# Altium PCB PCB_2020-07-24_15-45-59_2020-09-12_09-14-54.pcbdoc
Units mil, origin at the board's own origin, x right, y up, seen from the top; angles counter-clockwise.
Board outline 3558 x 2858.59 mil, 2 copper layers (Top Layer, Bottom Layer); 27 components, 24 nets, 132 pads, 36 vias.
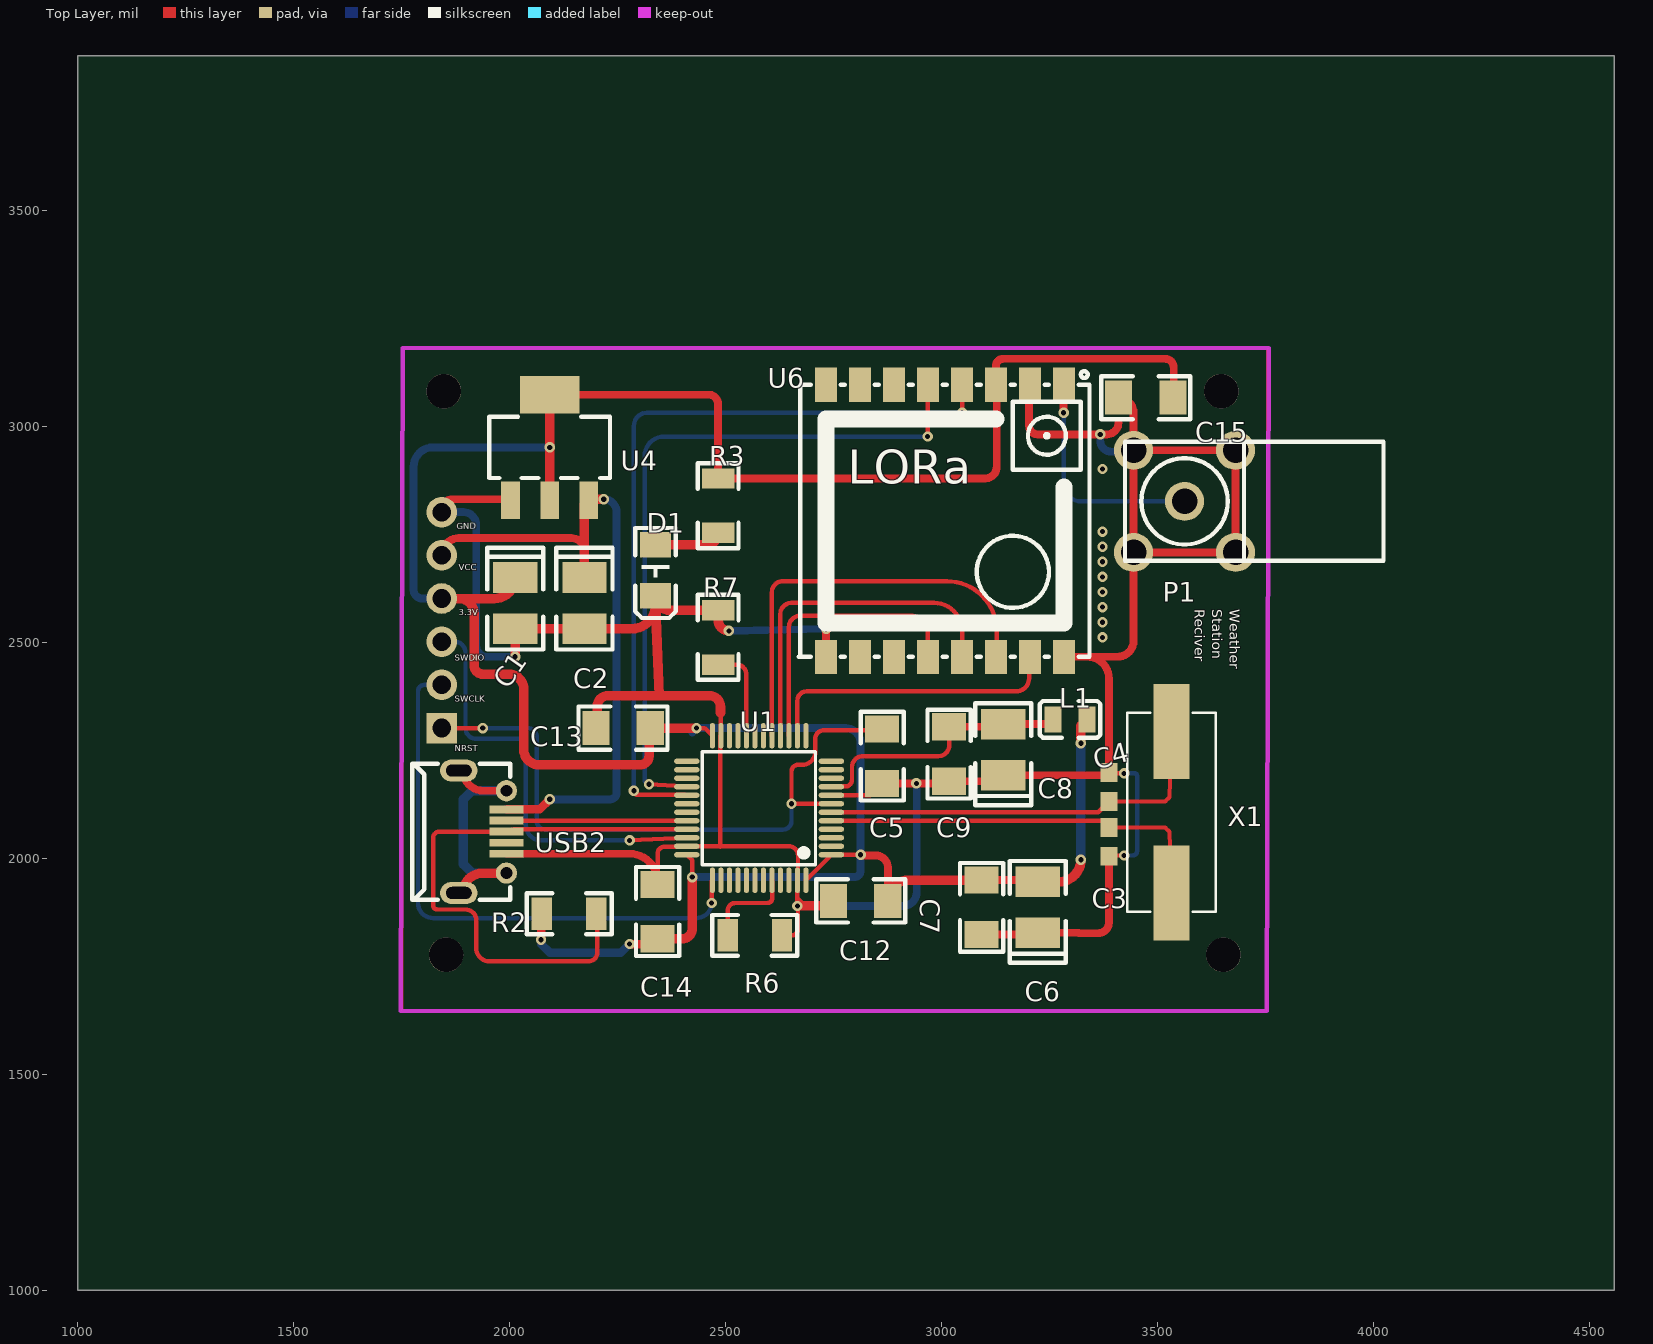
[diagram p0: Top Layer view]
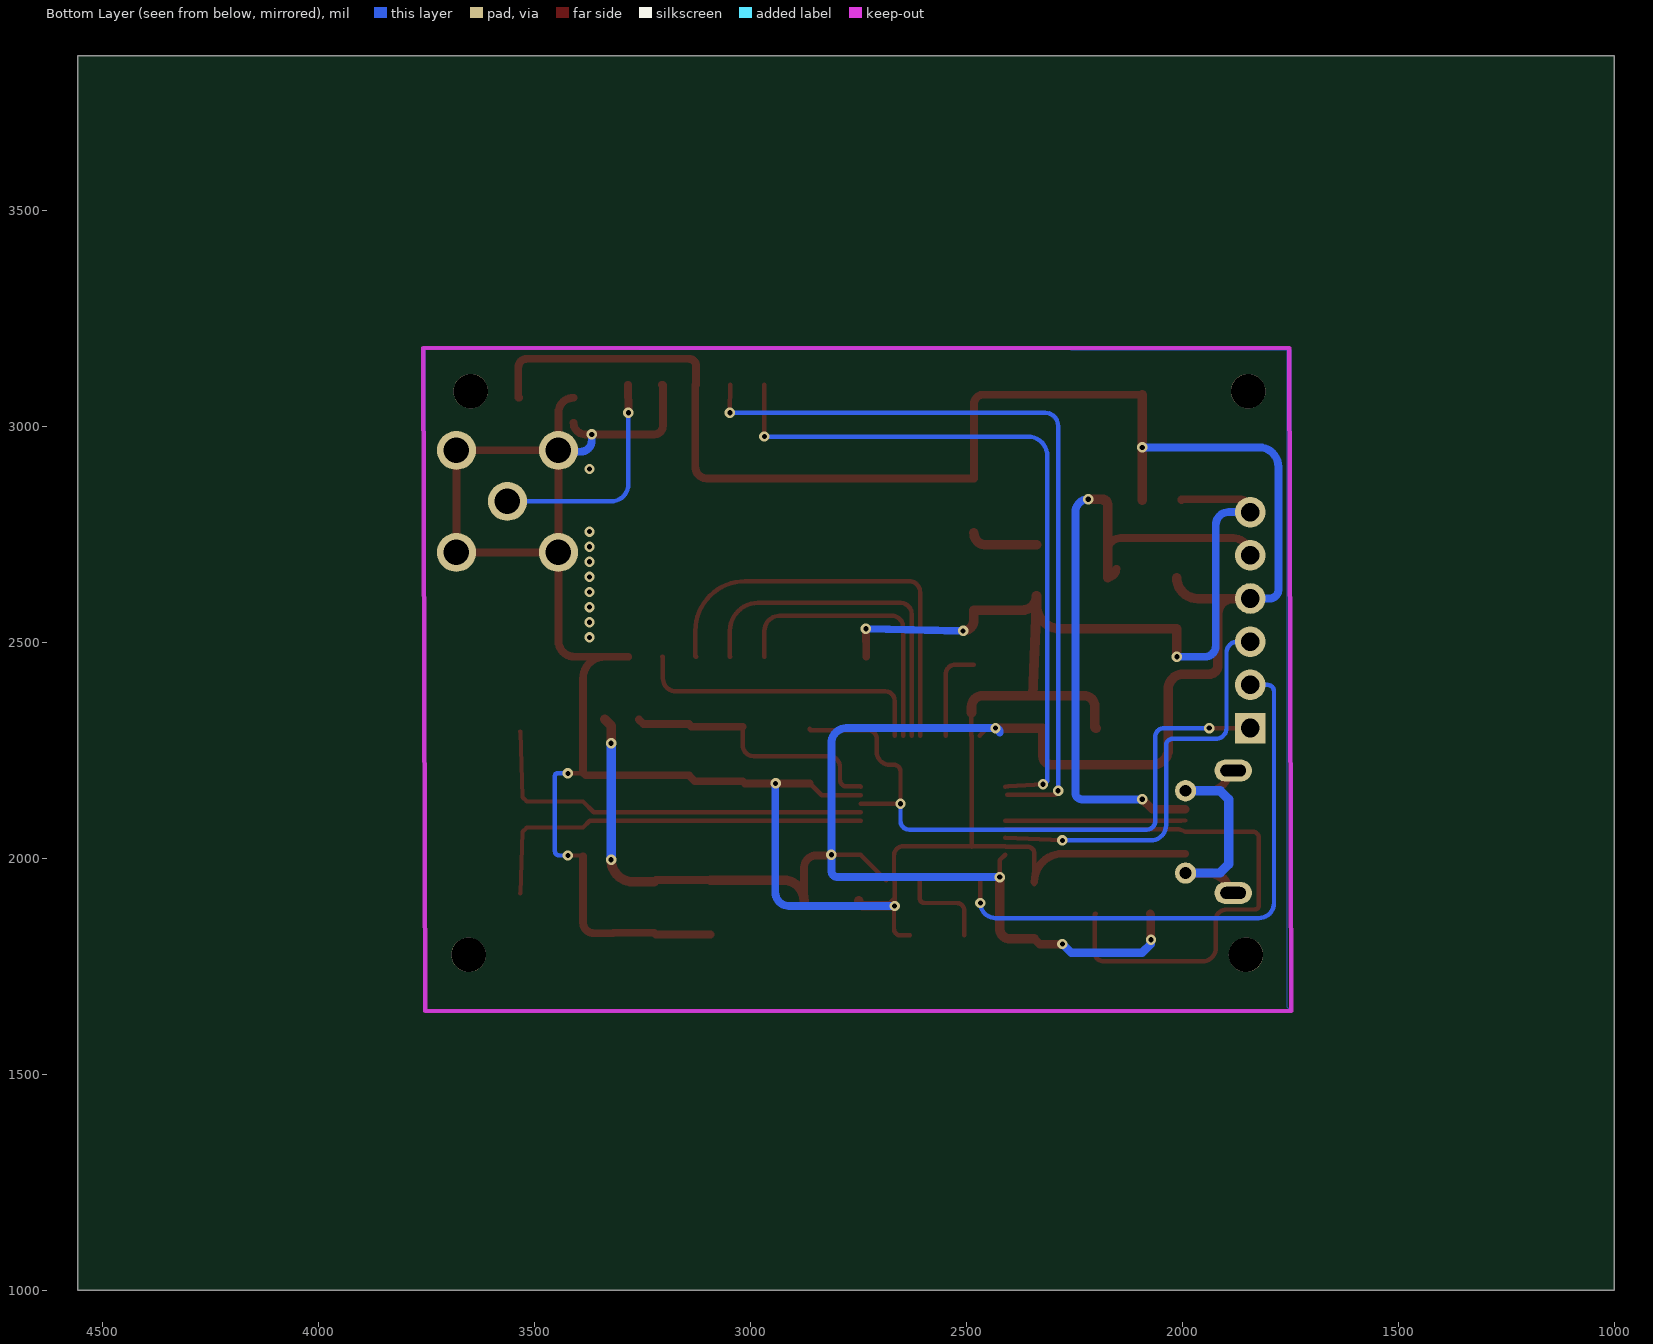
[diagram p1: Bottom Layer view, seen from below]

## Layer stack, top to bottom
Top Layer: signal copper (thickness not stored)
Dielectric: dielectric 12.6, FR-4, Dk 4.8
Bottom Layer: signal copper (thickness not stored)

## Board outline
4558,1000 1000,1000 1000,3858.59 4558,3858.59

## Components (designator, comment, footprint, x,y, rotation, side; value= is the part's Value field where it differs from the comment)
C1 "10uF" CAP-SMD_L3.5-W2.8-R-RD 2013.39,2591.2 r90 top
C2 "10uF" CAP-SMD_L3.5-W2.8-R-RD 2173.39,2591.2 r90 top
C3 "10PF" 0603 3387.89,2071.7 r270 top
C4 "10PF" 0603 3387.89,2131.7 r90 top
C5 "100nF" 1206 2862.89,2236.7 r90 top
C6 "10uF" CAP-SMD_L3.5-W2.8-R-RD 3222.89,1886.69 r270 top
C7 "100nF" 1206 3092.89,1886.69 r270 top
C8 "1uF" CAP-SMD_L3.5-W2.8-R-RD 3142.89,2251.7 r270 top
C9 "100nF" 1206 3017.89,2241.7 r270 top
C12 "100nF" 1206 2812.89,1901.69 r0 top
C13 "100nF" 1206 2262.89,2301.7 r180 top
C14 "100nF" 1206 2342.89,1876.69 r90 top
C15 "100nF" 1206 3472.89,3066.7 r0 top
D1 "LED" LED1206-R-RD 2337.89,2666.7 r90 top
L1 "4.7uH" L0805 3297.89,2321.7 r0 top
P1 "ANT-CON" SMA-KWE 3562.89,2826.7 r0 top
R2 "1.5k" R1206 2137.89,1871.69 r0 top
R3 "100" R1206 2482.89,2816.7 r270 top
R6 "10k" R1206 2567.89,1821.69 r180 top
R7 "10k" R1206 2482.89,2511.7 r90 top
U1 "STM32F103CBT6" LQFP-48_L7.0-W7.0-P0.50-LS9.0-BL 2577.89,2116.7 r90 top
U4 "AMS1117-3.3V" SOT-223-3_L6.5-W3.4-P2.30-LS7.0-BR 2092.89,2951.7 r270 top
U6 "RA-02" WIRELM-SMD_RA-02 3007.89,2781.7 r270 top
USB2 "Micro Usb" MICRO-USB-SMD_MICRO-USB-18 1937.89,2061.7 r270 top
X1 "8MHz" HC-49US-SMD 3532.89,2096.7 r90 top
? "" ? 2752.89,3269.14 r0 top
? "" ? 1627.49,2414.2 r0 top

## Footprints (in the part's own frame and the unit in brackets; to place one, negate y for a bottom-side part, rotate by r counter-clockwise, add the part's x,y. Pads: shape width x height; smd on the part's side, far side on the other; paste and mask are expansions set on the pad)
0603 [mm]
  rect 1.1x1 smd: 1(0,0) 2(1.7,0)
1206 [mil]
  rect 63x78.74 smd: 1(-62.99,0) 2(62.99,0)
  silkscreen extent -103,-50 103,50
CAP-SMD_L3.5-W2.8-R-RD [mil]
  rect 70.86x102.36 smd: 1(59.1,0) 2(-59.1,0)
  silkscreen extent -107,-65 128,65
HC-49US-SMD [mm]
  rect 5.6x2.1 smd: 1(-4.5,0) 2(5,0)
  silkscreen extent -5.6,-2.6 6.1,2.6
L0805 [mm]
  rect 1x1.55 smd: 1(-1,0) 2(1,0)
  silkscreen extent -1.78,-1.08 1.78,1.08
LED1206-R-RD [mm]
  rect 1.5x1.8 smd: 1(1.5,0) 2(-1.5,0)
  silkscreen extent -2.8,-1.2 2.5,1.2
LQFP-48_L7.0-W7.0-P0.50-LS9.0-BL [mm]
  oval 0.3x1.5 smd: 1(-2.75,-4.25) 2(-2.25,-4.25) 3(-1.75,-4.25) 4(-1.25,-4.25) 5(-0.75,-4.25) 6(-0.25,-4.25) 7(0.25,-4.25) 8(0.75,-4.25) 9(1.25,-4.25) 10(1.75,-4.25) 11(2.25,-4.25) 12(2.75,-4.25) 25(2.75,4.25) 26(2.25,4.25) 27(1.75,4.25) 28(1.25,4.25) 29(0.75,4.25) 30(0.25,4.25) 31(-0.25,4.25) 32(-0.75,4.25) 33(-1.25,4.25) 34(-1.75,4.25) 35(-2.25,4.25) 36(-2.75,4.25)
  oval 1.5x0.3 smd: 13(4.25,-2.75) 14(4.25,-2.25) 15(4.25,-1.75) 16(4.25,-1.25) 17(4.25,-0.75) 18(4.25,-0.25) 19(4.25,0.25) 20(4.25,0.75) 21(4.25,1.25) 22(4.25,1.75) 23(4.25,2.25) 24(4.25,2.75) 37(-4.25,2.75) 38(-4.25,2.25) 39(-4.25,1.75) 40(-4.25,1.25) 41(-4.25,0.75) 42(-4.25,0.25) 43(-4.25,-0.25) 44(-4.25,-0.75) 45(-4.25,-1.25) 46(-4.25,-1.75) 47(-4.25,-2.25) 48(-4.25,-2.75)
  silkscreen extent -3.33,-3.31 3.3,3.34
MICRO-USB-SMD_MICRO-USB-18 [mm]
  oval 1.3x2.199 hole 0.7 slot 1.5 at 90 deg: 0(-3.6,-1.407) 0(3.6,-1.407)
  round 1.25 hole 0.7: 0(-2.41,1.393) 0(2.431,1.393)
  rect 0.45x2 smd: 1(-1.31,1.407) 2(-0.66,1.407) 3(-0.01,1.407) 4(0.64,1.407) 5(1.29,1.407)
  silkscreen extent -4,-4.15 4,1.61
R1206 [mm]
  rect 1.2x1.9 smd: 1(-1.6,0) 2(1.6,0)
  silkscreen extent -2.5,-1.2 2.5,1.2
SMA-KWE [mm]
  round 2.3 hole 1.5: 1(0,0) 2(-3,3) 3(-3,-3) 4(3,-3) 5(3,3)
  silkscreen extent -3.5,-3.5 11.7,3.5
SOT-223-3_L6.5-W3.4-P2.30-LS7.0-BR [mm]
  rect 2.2x1.1 smd: 1(3.099,-2.3) 2(3.099,0) 3(3.099,2.3)
  rect 2.2x3.5 smd: 4(-3.099,0)
  silkscreen extent -1.8,-3.55 1.8,3.55
WIRELM-SMD_RA-02 [mm]
  rect 2x1.3 smd: 1(-8,7) 2(-8,5) 3(-8,3) 4(-8,1) 5(-8,-1) 6(-8,-3) 7(-8,-5) 8(-8,-7) 9(8,-7) 10(8,-5) 11(8,-3) 12(8,-1) 13(8,1) 14(8,3) 15(8,4.998) 16(8,7)
  silkscreen extent -8.8,-8.6 8,8.5
? [mil]

## Free pads (board coordinates)
  rect 70.87x70.87 hole 43.31: 1(1842.89,2301.7)
  round 70.87 hole 43.31: 2(1842.89,2401.7) 3(1842.89,2501.7) 5(1842.89,2701.7) 6(1842.89,2801.7) GND(1842.89,2601.7)
  round 80 hole 80 unplated: ""(1847.89,3081.7) ""(1852.89,1776.69) ""(3647.89,3081.7) ""(3652.89,1776.69)

## Via types
v1: diameter 24, hole 12, Top Layer to Bottom Layer, 36 vias

## Nets (pads, with @x,y where several pads share a name; then routed paths per layer and width w, separated by ;. In a path a pad name is that pad's centre, name@x,y a point inside that pad or via, vN(x,y) a via of type N, cw(c..) or ccw(c..) an arc to the next point about the centre after c; other vN are vias at no path point)
+3.3V: C1.1 C6.2 C7.1 C12.2 C13.1 C14.1 C15.2 L1.2 pad.GND R2.1 R3.1 U1.1 U1.24 U1.36 U1.48 U4.2 U4.4 U6.3 | length 7049.8
  Top Layer w10.24: U1.36 2422.89,1996.11 v1(2422.89,1956.69) ; v1(2432.89,2301.7) 2451.94,2301.7 U1.24 ; U1.48 U1.1 v1(2812.89,2008.42)
  Top Layer w17.87: C7.1 3219,1949.68 C6.2
  Top Layer w18.11: U4.4 2460.89,3073.7 cw(c2460.89,3051.7) 2482.89,3051.7 R3.1 3100.88,2879.68 ccw(c3100.88,2906.7) 3127.89,2906.7 3127.89,3094.76 ccw(c3126,3094.76) U6.3 3126,3139.8 cw(c3142.89,3139.8) 3142.89,3156.69 3517.89,3156.7 cw(c3517.89,3136.7) 3537.89,3136.7 3537.89,3068.7 cw(c3535.88,3068.7) C15.2 ; C12.2 2875.88,1978.7 ccw(c2847.89,1978.7) 2847.89,2006.69 v1@2814.62,2006.69 ; v1@2814.62,2006.69 cw(c2814.62,2008.42) v1(2812.89,2008.42) ccw(c2814.62,2008.42) v1@2814.62,2006.69
  Top Layer w19.68: v1(2072.89,1811.69) 2072.89,1869.69 R2.1 ; v1(2277.89,1801.69) 2330.88,1801.69 C14.1
  Top Layer w22.05: C1.1 cw(c1964.79,2650.3) 1964.79,2601.7 pad.GND 1882.89,2601.7 cw(c1882.89,2566.7) 1917.89,2566.7 1917.89,2446.7 ccw(c1937.89,2446.7) 1937.89,2426.7 1997.89,2426.7 cw(c1997.89,2391.7) 2032.89,2391.7 2032.89,2251.7 ccw(c2067.89,2251.7) 2067.89,2216.7 2302.89,2216.7 ccw(c2302.89,2236.7) 2322.89,2236.7 2322.89,2298.7 cw(c2325.88,2298.7) C13.1 ; U4.2 v1(2092.89,2951.7) U4.4 ; C13.1@2327.89,2299.68 ccw(c2325.88,2299.68) C13.1 ; C14.1 2399.9,1813.7 ccw(c2399.9,1836.69) 2422.89,1836.69 v1(2422.89,1956.69) ; v1(2432.89,2301.7) C13.1 ; C12.2 cw(c2923.87,1901.69) 2923.87,1949.68 C7.1 ; C6.2 3271.99,1945.8 ccw(c3271.99,1996.69) v1(3322.89,1996.69) ; v1(3322.89,2266.7) 3322.89,2307.32 L1.2
  Bottom Layer w18.11: pad.GND 1797.89,2601.7 cw(c1797.89,2621.7) 1777.89,2621.7 1777.89,2906.7 cw(c1822.89,2906.7) 1822.89,2951.7 v1(2092.89,2951.7) ; v1(2422.89,1956.69) 2797.89,1956.69 ccw(c2797.89,1971.69) 2812.89,1971.69 v1(2812.89,2008.42) 2812.89,2266.7 ccw(c2777.89,2266.7) 2777.89,2301.7 v1(2432.89,2301.7) ccw(c2432.89,2291.7) 2422.89,2291.7
  Bottom Layer w19.68: v1(2072.89,1811.69) 2072.89,1801.69 2092.89,1781.69 2257.89,1781.69 v1(2277.89,1801.69)
  Bottom Layer w22.05: v1(3322.89,1996.69) 3322.89,2001.69 v1(3322.89,2266.7)
D1_1: D1.1 R3.2 | length 161
  Top Layer w22.05: D1.1 2454.94,2725.74 ccw(c2454.94,2753.7) R3.2
GND: C1.2 C2.2 C3.2 C4.2 C5.1 C6.1 C7.2 C8.1 C9.2 C12.1 C13.2 C14.2 C15.1 D1.2 P1.2 P1.3 P1.4 P1.5 pad.6 R6.1 R7.2 U1.8 U1.23 U1.35 U1.47 U4.1 U6.2 U6.9 U6.16 USB2.5 | length 8020.5
  Top Layer w10.24: C14.2 2342.89,2011.69 cw(c2357.89,2011.69) 2357.89,2026.69 2409.15,2026.69 U1.35 ; 2474.52,2028.12 U1.35 ; 2487.89,2027.01 U1.23@2487.89,2281.7 ; U1.23@2487.89,2282.59 cw(c2489.31,2282.59) U1.23 ; 2487.89,2341.7 2489.31,2330.28 U1.23 ; U1.23@2488.09,2282.8 cw(c2489.31,2282.8) U1.23 ; R6.1 2652.89,1821.69 ccw(c2652.89,1836.69) 2667.89,1836.69 2667.89,1888.4 ccw(c2666.47,1888.4) v1(2666.47,1889.82) U1.47 ; 2677.89,1896.69 2666.47,1908.12 U1.47 ; U1.8 2835.41,2146.22 C5.1 ; C3.2 3389.82,2006.69 v1(3422.89,2006.69) ; C4.2 3389.82,2196.7 v1(3422.89,2196.7) ; U1.35 2646.47,2028.12 cw(c2646.47,2006.69) 2667.89,2006.69 2667.89,1950.8 cw(c2666.47,1950.8) U1.47
  Top Layer w17.72: USB2.5 2277.49,2010.89 cw(c2277.53,1945.56) C14.2@2342.89,1945.56
  Top Layer w17.87: C7.2 3219,1823.7 C6.1 3317.89,1827.6 ccw(c3318.79,1827.6) 3318.79,1826.69 3362.89,1826.69 ccw(c3362.89,1851.69) 3387.89,1851.69 C3.2 ; C8.1 3381.86,2192.59 C4.2 3387.89,2416.7 ccw(c3337.85,2416.7) 3337.85,2466.74 U6.16
  Top Layer w18.11: pad.6 1842.89,2806.7 cw(c1867.89,2806.7) 1867.89,2831.7 2000.34,2831.7 cw(c2000.34,2829.7) U4.1 ; U6.9 v1(2732.89,2531.7) ; C5.1 v1(2941.88,2173.7) 3012.89,2173.7 C9.2 3129,2178.7 C8.1 ; U6.2 ccw(c3204.74,3094.8) 3202.89,3094.8 3202.89,3001.7 ccw(c3222.89,3001.7) 3222.89,2981.7 v1(3367.7,2981.7) 3382.89,2981.7 ccw(c3382.89,3008.7) 3409.9,3008.7 ; U6.16 ccw(c3283.52,2466.74) U6.16 3407.89,2466.7 ccw(c3407.89,2503.59) 3444.79,2503.59 P1.3 ; C15.1 cw(c3409.9,3031.8) 3444.79,3031.8 P1.2 ; P1.3 P1.2 ; P1.3 P1.4 P1.5 P1.2
  Top Layer w22.05: v1(2012.89,2466.7) C1.2 C2.2 ccw(c2173.79,2532.1) 2173.79,2531.7 2282.89,2531.7 ccw(c2282.89,2586.7) D1.2@2337.89,2586.7 ; C13.2 ccw(c2199.9,2304.68) 2202.89,2304.68 2202.89,2351.7 cw(c2227.89,2351.7) 2227.89,2376.7 2346.12,2376.7 ; 2488.41,2337.51 2488.41,2351.18 ccw(c2462.89,2351.18) 2462.89,2376.7 2346.12,2376.7 ; v1(2507.89,2526.7) cw(c2507.89,2551.7) 2482.89,2551.7 R7.2 2370.84,2574.68 cw(c2370.84,2607.64) D1.2 D1.2@2337.89,2586.7 ; v1(2666.47,1889.82) 2738.02,1889.82 ccw(c2738.02,1901.69) C12.1 ; D1.2@2337.89,2586.7 2346.12,2376.7
  Bottom Layer w10.24: v1(3422.89,2006.69) 3442.89,2006.69 ccw(c3442.89,2016.69) 3452.89,2016.69 3452.89,2191.7 ccw(c3447.89,2191.7) 3447.89,2196.7 v1(3422.89,2196.7) ; P1.2@3442.89,2946.7 cw(c3442.89,2944.8) P1.2 ccw(c3442.89,2944.8) P1.2@3442.89,2946.7
  Bottom Layer w18.11: pad.6 1892.89,2801.7 cw(c1892.89,2771.7) 1922.89,2771.7 1922.89,2491.7 ccw(c1947.89,2491.7) 1947.89,2466.7 v1(2012.89,2466.7) ; v1(2507.89,2526.7) v1(2732.89,2531.7) ; v1(2666.47,1889.82) 2911.01,1889.82 ccw(c2911.01,1921.69) 2942.89,1921.69 2942.89,2172.7 ccw(c2941.88,2172.7) v1(2941.88,2173.7) ; v1(3367.7,2981.7) 3367.7,2966.88 ccw(c3392.89,2966.88) 3392.89,2941.69 3441.69,2941.7 ccw(c3441.69,2944.8) P1.2
LORA_DIO0: U1.28 U6.5 | length 1654.5
  Top Layer w10.24: v1(2322.89,2171.7) 2402.89,2166.7 U1.28 ; v1(2967.89,2976.7) 2967.89,3096.03 U6.5
  Bottom Layer w10.24: v1(2322.89,2171.7) cw(c2322.89,2181.7) 2312.89,2181.7 2312.89,2931.7 cw(c2357.89,2931.7) 2357.89,2976.7 v1(2967.89,2976.7)
LORA_MISO: U1.16 U6.13 | length 814.8
  Top Layer w10.24: U1.16 2627.1,2565.91 cw(c2652.89,2565.91) 2652.89,2591.7 2982.89,2591.7 cw(c2982.89,2526.7) 3047.89,2526.7 3047.89,2467.36 cw(c3047.26,2467.36) U6.13
LORA_MOSI: U1.17 U6.14 | length 993.9
  Top Layer w10.24: U1.17 2607.42,2616.22 cw(c2632.89,2616.22) 2632.89,2641.69 3012.89,2641.7 cw(c3012.89,2526.7) 3127.89,2526.7 3127.89,2468.62 cw(c3126,2468.62) U6.14
LORA_NSS: U1.14 U6.15 | length 698.1
  Top Layer w10.24: U1.14 2666.47,2365.28 cw(c2687.89,2365.28) 2687.89,2386.7 3172.89,2386.7 ccw(c3172.89,2416.7) 3202.89,2416.7 3202.89,2464.95 cw(c3204.68,2464.95) U6.15
LORA_RST: U1.29 U6.4 | length 1814.1
  Top Layer w10.24: v1@2282.89,2157.49 2293.36,2147.01 U1.29@2405.57,2147.01 ; U6.4 v1(3047.89,3031.7)
  Bottom Layer w10.24: v1(2287.89,2156.7) 2287.89,3001.7 cw(c2317.89,3001.7) 2317.89,3031.7 v1(3047.89,3031.7)
LORA_SCK: U1.15 U6.12 | length 667.9
  Top Layer w10.24: U1.15 2646.79,2535.59 cw(c2672.89,2535.59) 2672.89,2561.69 2932.89,2561.7 cw(c2932.89,2526.7) 2967.89,2526.7 2967.89,2467.36 ccw(c2968.52,2467.36) U6.12
NRST: C5.2 pad.1 U1.7 | length 1526.5
  Top Layer w10.24: pad.1 v1(1937.89,2301.7) ; U1.7 2745.05,2126.7 v1(2652.89,2126.7) 2652.89,2201.7 cw(c2667.89,2201.7) 2667.89,2216.7 2677.89,2216.7 ccw(c2677.89,2246.7) 2707.89,2246.7 2707.89,2276.7 cw(c2727.89,2276.7) 2727.89,2296.7 2860.71,2296.7 ccw(c2860.71,2296.86) C5.2@2860.87,2296.86 ; C5.2@2859.9,2296.7 ccw(c2859.9,2299.68) C5.2
  Bottom Layer w10.24: v1(1937.89,2301.7) 2042.89,2301.7 cw(c2042.89,2281.7) 2062.89,2281.7 2062.89,2086.7 ccw(c2082.89,2086.7) 2082.89,2066.7 2632.89,2066.7 ccw(c2632.89,2086.7) 2652.89,2086.7 v1(2652.89,2126.7)
P1_1: P1.1 U6.1 | length 532.8
  Top Layer w18.11: v1(3282.89,3031.7) U6.1
  Bottom Layer w10.24: v1(3282.89,3031.7) 3282.89,2866.7 ccw(c3322.89,2866.7) 3322.89,2826.7 P1.1
S$98: 
S$107: 
SWCLK: pad.2 U1.37 | length 1326.9
  Top Layer w10.24: v1(2467.89,1896.69) 2467.89,1947.65 U1.37
  Bottom Layer w10.24: pad.2 1802.89,2401.7 ccw(c1802.89,2386.7) 1787.89,2386.7 1787.89,1896.69 ccw(c1822.89,1896.69) 1822.89,1861.69 2432.89,1861.69 ccw(c2432.89,1896.69) v1(2467.89,1896.69)
SWDIO: pad.3 U1.34 | length 984.9
  Top Layer w10.24: v1(2277.89,2041.69) U1.34
  Bottom Layer w10.24: pad.3 1872.89,2501.7 cw(c1872.89,2476.7) 1897.89,2476.7 1897.89,2301.7 ccw(c1922.89,2301.7) 1922.89,2276.7 2022.89,2276.7 cw(c2022.89,2261.7) 2037.89,2261.7 2037.89,2076.7 ccw(c2072.89,2076.7) 2072.89,2041.7 v1(2277.89,2041.69)
U1_5: C3.1 U1.5 X1.1 | length 937
  Top Layer w10: X1.1 3527.89,2061.7 3517.89,2071.7 C3.1 3372.42,2087.16 U1.5 ; U1.5 ccw(c2745.68,2087.16) 2745.68,2086.7 cw(c2745.68,2087.16) U1.5
U1_6: C4.1 U1.6 X1.2 | length 970.6
  Top Layer w10: C4.1@3373.05,2116.86 C4.1 ; X1.2@3532.89,2293.59 3527.89,2141.7 3517.89,2131.7 C4.1 ; U1.6 3363.05,2106.86 C4.1 ; U1.6 ccw(c2745.37,2106.86) 2745.37,2106.7 cw(c2745.37,2106.86) U1.6
U1_9: C8.2 C9.1 L1.1 U1.9 | length 630.9
  Top Layer w10.24: U1.9 cw(c2746,2165.91) 2746,2166.7 2777.89,2166.7 ccw(c2777.89,2181.7) 2792.89,2181.7 2792.89,2211.7 cw(c2817.89,2211.7) 2817.89,2236.7 2992.89,2236.7 ccw(c2992.89,2261.7) 3017.89,2261.7 C9.1
  Top Layer w18.11: C9.1 3136.78,2304.68 C8.2 3247.62,2310.8 L1.1
U1_20: R7.1 U1.20 | length 220.5
  Top Layer w10.24: R7.1 2525.89,2448.7 cw(c2525.89,2426.7) 2547.89,2426.7 2547.89,2284.49 ccw(c2548.36,2284.49) U1.20
U1_44: R6.2 U1.44 | length 218.9
  Top Layer w10.24: R6.2 2504.9,1878.7 cw(c2522.89,1878.7) 2522.89,1896.69 2597.89,1896.69 ccw(c2597.89,1906.69) 2607.89,1906.69 2607.89,1948.9 ccw(c2607.42,1948.9) U1.44
USB2_0: USB2.0 | length 619.6
  Top Layer w17.72: USB2.0@1892.48,2203.43 ccw(c1939.31,2203.43) 1939.31,2156.6 USB2.0@1992.69,2156.59
  Top Layer w22.05: USB2.0@1892.48,1919.96 cw(c1938.51,1919.96) 1938.51,1965.99 USB2.0@1992.69,1965.99
  Bottom Layer w22.05: USB2.0@1992.69,1965.99 1912.89,1966.69 1892.89,1986.69 1892.89,2136.7 1912.79,2156.59 USB2.0@1992.69,2156.59
USB_DM: U1.32 USB2.2 | length 417.3
  Top Layer w10: USB2.2 2003.29,2087.2 U1.32
USB_DP: R2.2 U1.33 USB2.3 | length 1337.1
  Top Layer w10: USB2.3 2008.69,2067.49 U1.33
  Top Layer w10.24: USB2.3 1838.29,2062.09 ccw(c1838.3,2046.69) 1822.89,2046.69 1822.89,1891.69 ccw(c1832.89,1891.69) 1832.89,1881.69 1897.89,1881.69 cw(c1897.89,1856.69) 1922.89,1856.69 1922.89,1791.69 ccw(c1952.89,1791.69) 1952.89,1761.69 2182.89,1761.69 ccw(c2182.89,1781.69) 2202.89,1781.69 2202.89,1869.68 ccw(c2200.88,1869.68) R2.2
VCC: C2.1 pad.5 U4.3 USB2.1 | length 1723.1
  Top Layer w18.11: pad.5 cw(c1882.89,2701.7) 1882.89,2741.7 2142.89,2741.7 cw(c2142.89,2711.2) 2173.39,2711.2 C2.1 ; C2.1@2152.89,2670.8 ccw(c2173.39,2670.8) C2.1 ; 2173.39,2715.99 C2.1
  Top Layer w19.68: USB2.1 2069.49,2113.3 v1(2092.89,2136.7)
  Top Layer w22.05: C2.1 2173.39,2819.64 cw(c2185.44,2819.64) U4.3@2185.44,2831.7 ; U4.3 U4.3@2185.44,2831.7 ; v1(2217.89,2831.7) U4.3@2185.44,2831.7
  Bottom Layer w18.11: v1(2092.89,2136.7) 2232.89,2136.7 ccw(c2232.89,2151.7) 2247.89,2151.7 2247.89,2801.7 ccw(c2217.89,2801.7) v1(2217.89,2831.7)
pads on no net: U1.2 U1.3 U1.4 U1.10 U1.11 U1.12 U1.13 U1.18 U1.19 U1.21 U1.22 U1.25 U1.26 U1.27 U1.30 U1.31 U1.38 U1.39 U1.40 U1.41 U1.42 U1.43 U1.45 U1.46 U6.6 U6.7 U6.8 U6.10 U6.11 USB2.4
copper on no net:
  other v1: 3372.89,2511.7 3372.89,2546.7 3372.89,2581.7 3372.89,2616.7 3372.89,2651.7 3372.89,2686.7 3372.89,2721.7 3372.89,2756.7 3372.89,2901.7

## Polygon pours and split planes (outlines as drawn)
GND on Top Layer (solid): 1752.89,3181.7 1752.89,1651.69 1747.89,1646.69 3752.89,1646.69 3752.89,3176.7 3757.89,3181.7
GND on Bottom Layer (solid): 1747.89,1646.69 1747.89,3176.7 1752.89,3181.7 3757.89,3181.7 3757.89,1651.69 3752.89,1646.69
GND on Bottom Layer (solid): 1757.89,3176.7 1757.89,1656.69 1747.89,1646.69 3752.89,1646.69 3752.89,3176.7 3757.89,3181.7
GND on Top Layer (solid): 1752.89,3181.7 1752.89,1651.69 1747.89,1646.69 3752.89,1646.69 3752.89,3176.7 3757.89,3181.7

## Silkscreen, mask and mechanical layers (free items; w line width, h text height)
Top Overlay:
  text "GND" at 1877.89,2756.7 h24.88 r1
  text "VCC" at 1882.89,2661.7 h24.88
  text "Weather             / Station                   / Reciver" at 3577.89,2576.7 h40.63 r270
  text "3.3V" at 1882.89,2556.7 h24.88
  text "SWDIO" at 1872.89,2451.7 h24.88
  text "SWCLK" at 1872.89,2356.7 h24.88
  text "NRST" at 1872.89,2241.7 h24.88

## Text inside footprints (layer, text, board x,y; h text height)
U6: Top Overlay "LORa" at 2782.89,2867.32 h78.74